# Altium PCB 驱动1.PCBDOC
Units mil, origin at the board's own origin, x right, y up, seen from the top; angles counter-clockwise.
Board outline 2276.43 x 1535.43 mil, 2 copper layers (Top Layer, Bottom Layer); 23 components, 13 nets, 73 pads, 0 vias.
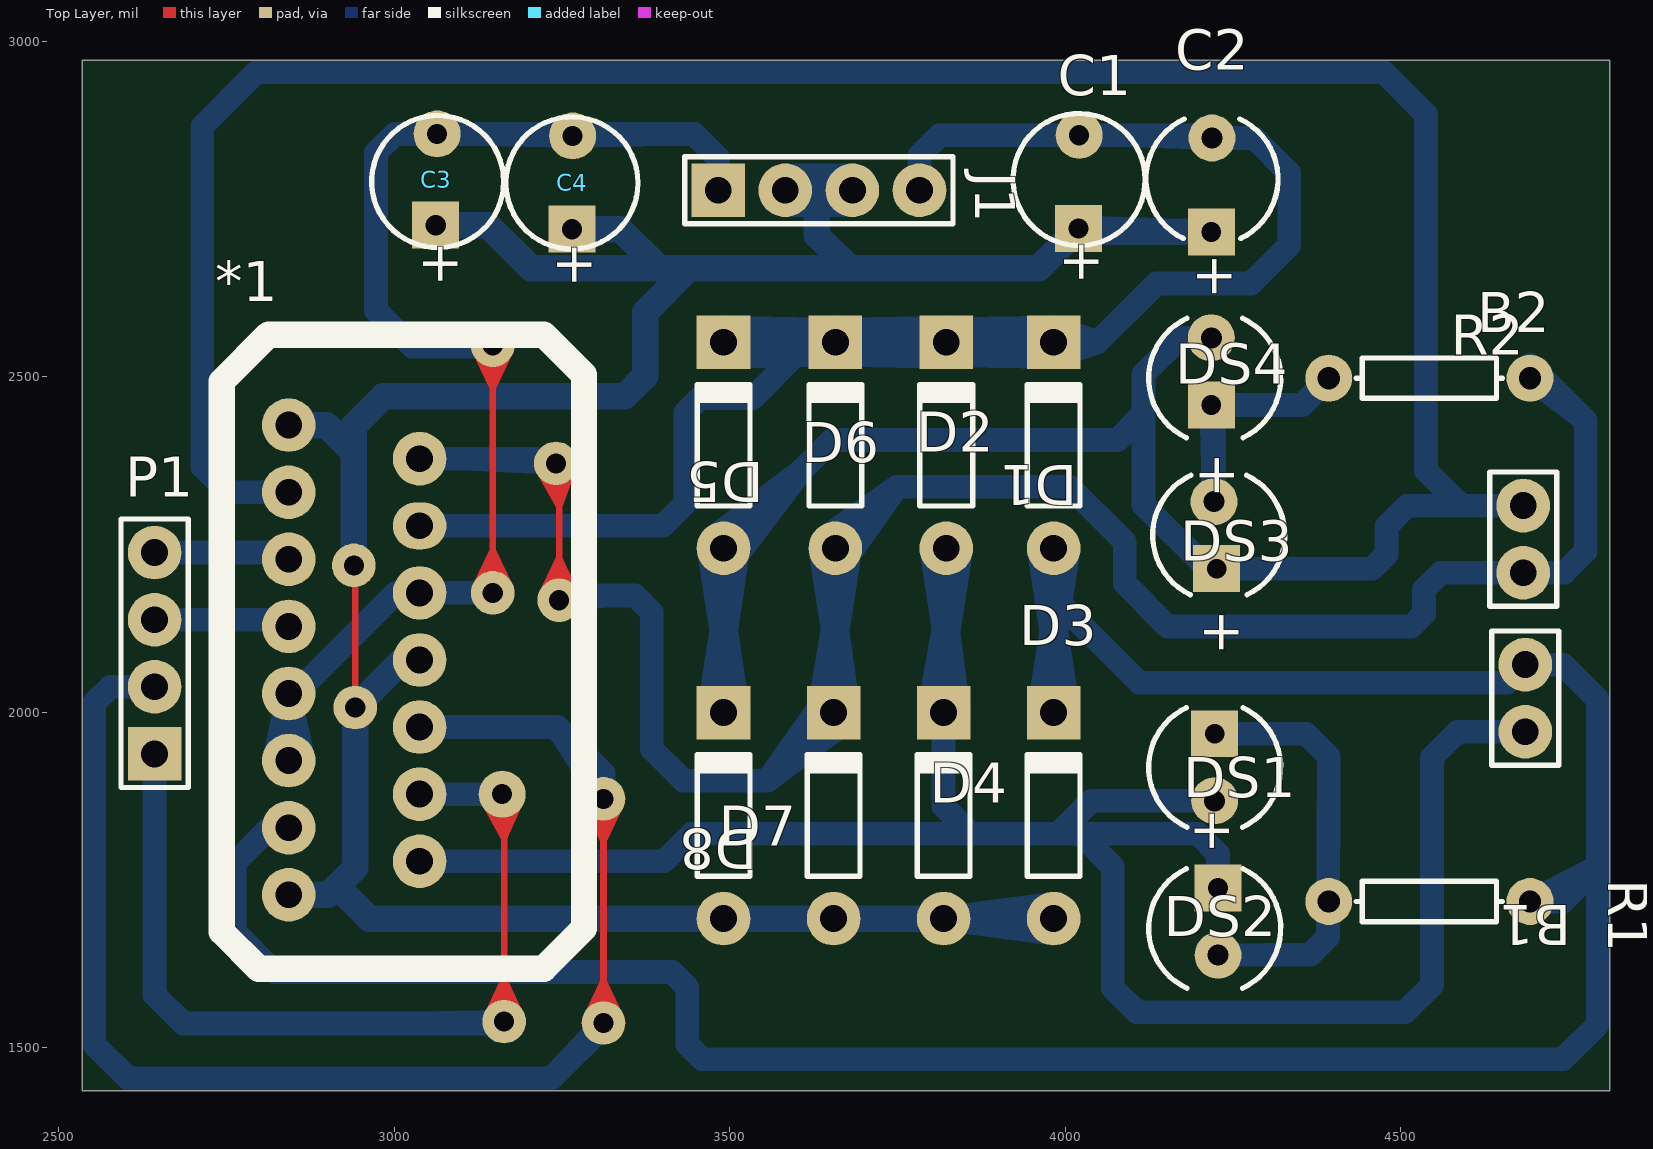
[diagram p0: Top Layer view]
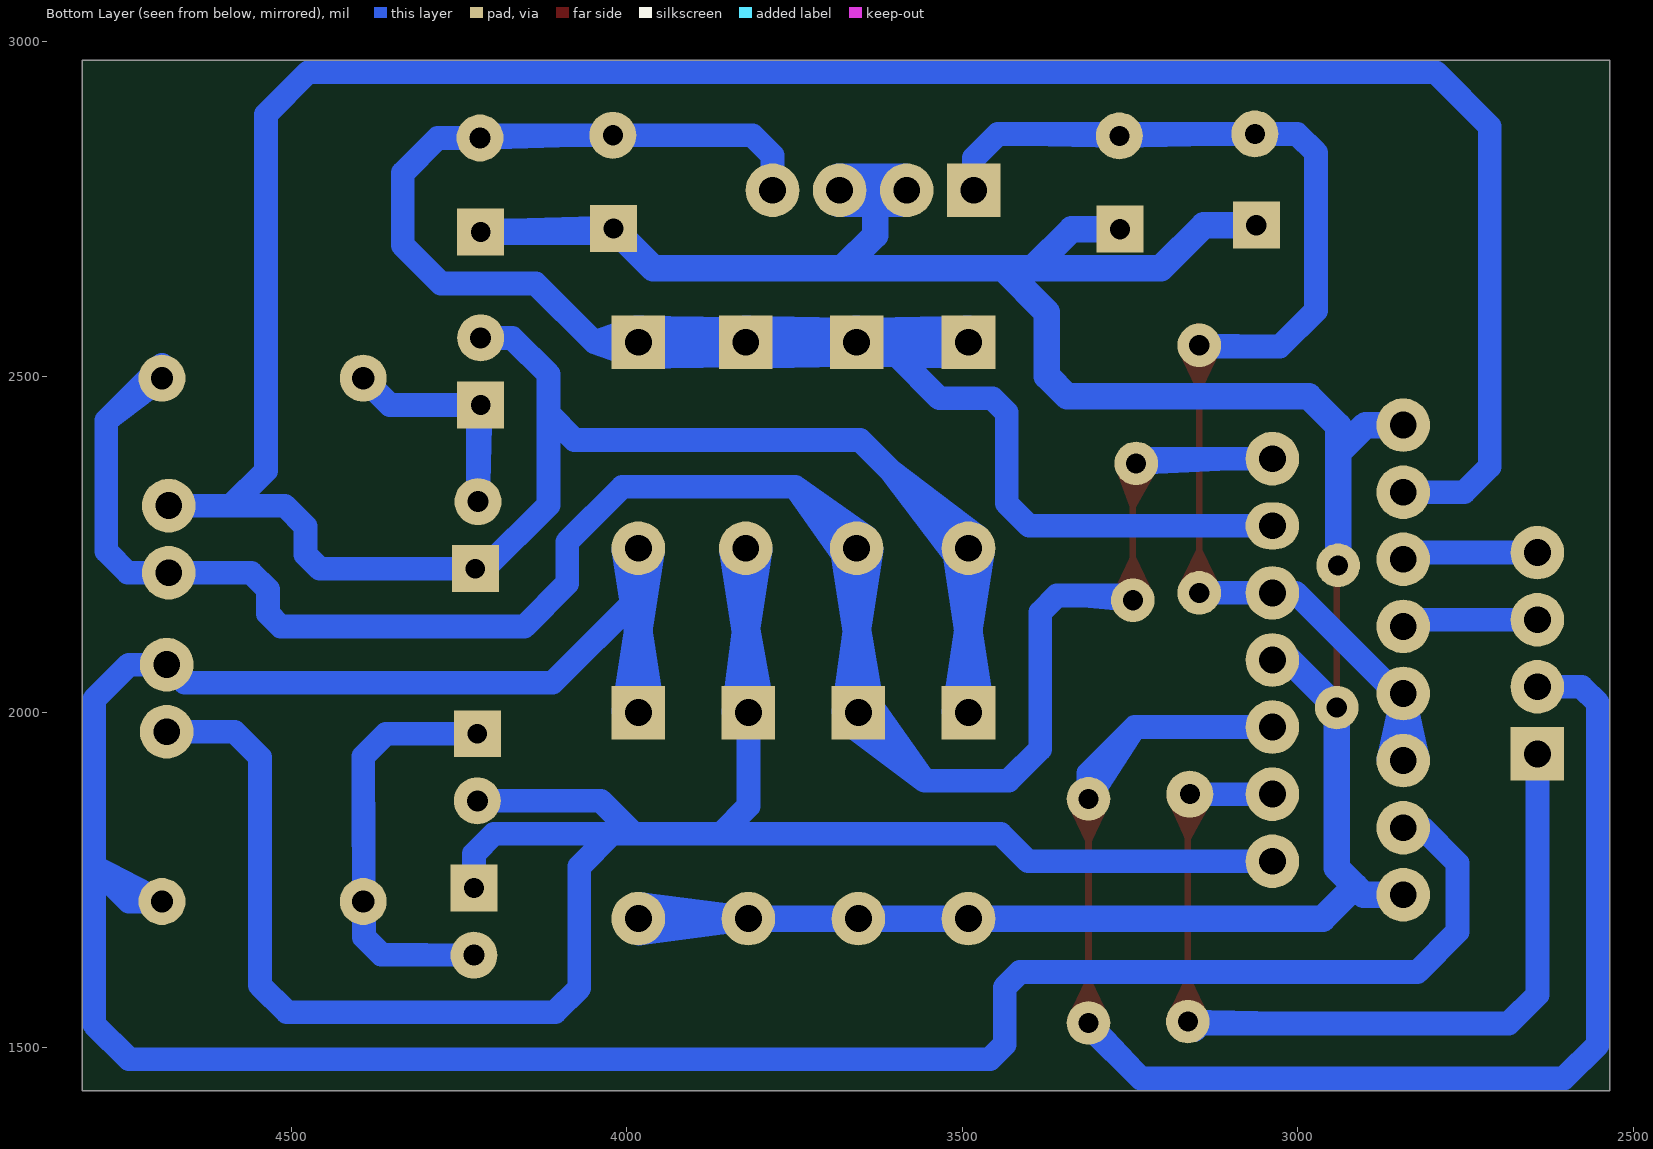
[diagram p1: Bottom Layer view, seen from below]

## Layer stack, top to bottom
Top Layer: signal copper 1.4
Dielectric: dielectric 12.6, FR-4, Dk 4.8
Bottom Layer: signal copper 1.4

## Board outline
2535.28,1436.28 4811.72,1436.28 4811.72,2971.72 2535.28,2971.72

## Design rules (kind name [scope] priority, off if disabled: settings)
Clearance [All] p1: gap=30
ComponentClearance [All] p1: gap=10 collisioncheckmode=0 verticalgap=10
FanoutControl Fanout_Small [All] p1 off: bgadir=Out bgaviamode=Centered fanoutstyle=Auto fanoutdirection=Alternating viagrid=1 // Protel DXP Scope 1 Expression Was: (CompPinCount < 5)   Fanout_Small (Default Rule)
FanoutControl Fanout_Default [All] p2: bgadir=Out bgaviamode=Centered fanoutstyle=Auto fanoutdirection=Alternating viagrid=1 // Fanout_Default (Default Rule)
FanoutControl Fanout_SOIC [All] p3 off: bgadir=Out bgaviamode=Centered fanoutstyle=Auto fanoutdirection=Alternating viagrid=1 // Protel DXP Scope 1 Expression Was: IsSOIC   Fanout_SOIC (Default Rule)
FanoutControl Fanout_BGA [All] p4 off: bgadir=Out bgaviamode=Centered fanoutstyle=Auto fanoutdirection=Alternating viagrid=1 // Protel DXP Scope 1 Expression Was: IsBGA   Fanout_BGA (Default Rule)
FanoutControl Fanout_LCC [All] p5 off: bgadir=Out bgaviamode=Centered fanoutstyle=Auto fanoutdirection=Alternating viagrid=1 // Protel DXP Scope 1 Expression Was: IsLCC   Fanout_LCC (Default Rule)
PolygonConnect [All] p1: connectstyle=Relief reliefconductorwidth=10 reliefentries=4 polygonreliefangle="90 Angle"
RoutingVias [All] p1: holewidth=28 width=50 viastyle="Through Hole" minholewidth=28 minwidth=50 maxholewidth=28 maxwidth=50
SolderMaskExpansion [All] p1: expansion=4
TestPointUsage [All] p1: valid=0 allowmultiple=FALSE
Testpoint [All] p1: side=15 testpointundercomponent=TRUE minsize=40 maxsize=100 preferedsize=60 minholesize=0 maxholesize=40 preferedholesize=32 testpointgrid=1 style=1023 order=0-112345678
Width Width_1 [InNet('GND')] p1: maxlimit=39.37 minlimit=10 preferedwidth=10
Width [All] p2: maxlimit=39.37 minlimit=10 preferedwidth=35.43
13 further rules are at their usual default settings.

## Components (designator, comment, footprint, x,y, rotation, side; value= is the part's Value field where it differs from the comment)
*1 "Component_1" PCBComponent_1 2843,2428 r0 top
B1 "Motor Servo" RAD-0.1 4686,2021 r270 top
B2 "Motor Servo" RAD-0.1 4683,2258 r90 top
C1 "Cap" CAPPR2-5x6.8#1 4021,2794 r90 top
C2 "Cap" CAPPR5-5x5#1 4219,2795 r90 top
C3 "Cap" CAPPR2-5x6.8#2 3065,2791 r90 top
C4 "Cap" CAPPR2-5x6.8#3 3265,2789 r90 top
D1 "Diode" DO-35A 3983,2398 r90 top
D2 "Diode" DO-35A 3823,2398 r90 top
D3 "Diode 1N4001" DO-35A 3983,1846 r90 top
D4 "Diode 1N4001" DO-35A 3819,1846 r90 top
D5 "Diode" DO-35A 3491,2398 r90 top
D6 "Diode" DO-35A 3657.67,2398 r90 top
D7 "Diode 1N4001" DO-35A 3655,1846 r90 top
D8 "Diode 1N4001" DO-35A 3491,1846 r90 top
DS1 "LED0" CAPPR5-5x5#2 4223,1918 r270 top
DS2 "LED0" CAPPR5-5x5#3 4223,1678 r270 top
DS3 "LED0" CAPPR5-5x5#4 4229,2264 r90 top
DS4 "LED0" CAPPR5-5x5#5 4223,2498 r90 top
J1 "CON4" HDR1X4 3483,2778 r0 top
P1 "Header 4" HDR1X4 2643,1938 r90 top
R1 "Res2" AXIAL-0.3 4543,1718 r0 top
R2 "Res2" AXIAL-0.3 4543,2498 r180 top

## Footprints (in the part's own frame and the unit in brackets; to place one, negate y for a bottom-side part, rotate by r counter-clockwise, add the part's x,y. Pads: shape width x height; smd on the part's side, far side on the other; paste and mask are expansions set on the pad)
AXIAL-0.3 [mil]
  round 70 hole 33.46: 1(-150,0) 2(150,0)
  silkscreen extent -109,-30 109,30
CAPPR2-5x6.8#1 [mil]
  rect 70x70 hole 30: 1(-73,1)
  round 70 hole 30: 2(66,0)
  silkscreen extent -98,-98 98,98
CAPPR2-5x6.8#2 [mil]
  rect 70x70 hole 30: 1(-65,3)
  round 70 hole 30: 2(71,1)
  silkscreen extent -98,-98 98,98
CAPPR2-5x6.8#3 [mil]
  rect 70x70 hole 30: 1(-69,0)
  round 70 hole 30: 2(70,-1)
  silkscreen extent -98,-98 98,98
CAPPR5-5x5#1 [mil]
  rect 70x70 hole 29.53: 1(-79,1)
  round 70 hole 31.5: 2(61,0)
  silkscreen extent -89,-98 89,98
CAPPR5-5x5#2 [mil]
  rect 70x70 hole 29.53: 1(-50,0)
  round 70 hole 31.5: 2(50,0)
  silkscreen extent -89,-98 89,98
CAPPR5-5x5#3 [mil]
  rect 70x70 hole 29.53: 1(-60,5)
  round 70 hole 31.5: 2(40,5)
  silkscreen extent -89,-98 89,98
CAPPR5-5x5#4 [mil]
  rect 70x70 hole 29.53: 1(-50,3)
  round 70 hole 31.5: 2(50,7)
  silkscreen extent -89,-98 89,98
CAPPR5-5x5#5 [mil]
  rect 70x70 hole 29.53: 1(-40,5)
  round 70 hole 31.5: 2(60,5)
  silkscreen extent -89,-98 89,98
DO-35A [mil]
  round 80 hole 40: 1(-153.54,0)
  rect 80x80 hole 40: 2(153.54,0)
  silkscreen extent -91,-39 94,39
HDR1X4 [mil]
  rect 80x80 hole 40: 1(0,0)
  round 80 hole 40: 2(100,0) 3(200,0) 4(300,0)
  silkscreen extent -50,-50 350,50
PCBComponent_1 [mil]
  round 80 hole 40: 1(0,0) 2(195,-50) 3(0,-100) 5(0,-200) 6(195,-250) 7(0,-300) 8(195,-350) 9(0,-400) 10(195,-450) 11(0,-500) 12(195,-550) 13(0,-600) 14(195,-650) 15(0,-700)
  oval 80x70 hole 40: 4(195,-150)
  silkscreen extent -100,-810 440,135
RAD-0.1 [mil]
  round 80 hole 40: 1(-50,0) 2(50,0)
  silkscreen extent -100,-50 100,50

## Free pads (board coordinates)
  round 65 hole 30: 0(2940,2219) 1(2942,2007) 4(3312,1537) 5(3164,1539) 6(3241,2371) 7(3246,2167) 8(3312,1871) 9(3147,2547) 10(3147,2178)
  round 70 hole 30: 2(3161,1878)

## Nets (pads, with @x,y where several pads share a name; then routed paths per layer and width w, separated by ;. In a path a pad name is that pad's centre, name@x,y a point inside that pad or via, vN(x,y) a via of type N, cw(c..) or ccw(c..) an arc to the next point about the centre after c; other vN are vias at no path point)
6: *1.6 *1.9 *1.11 C3.2 C4.2 J1.1 pad.9 pad.10 | length 3267.2
  Top Layer w10: pad.10@3120.17,2184.05 3147,2240.5 ; pad.9@3120.17,2540.95 3147,2484.5 ; pad.10@3129.67,2180.45 3147,2240.5 ; pad.9@3129.67,2544.55 3147,2484.5 ; pad.10@3139.51,2178.45 3147,2240.5 ; pad.9@3139.51,2546.55 3147,2484.5 ; pad.10 3147,2573 pad.9@3149,2575 ; pad.9 3147,2484.5 ; pad.10@3154.49,2178.45 3147,2240.5 ; pad.9@3154.49,2546.55 3147,2484.5 ; pad.10@3164.33,2180.45 3147,2240.5 ; pad.9@3164.33,2544.55 3147,2484.5 ; pad.10@3173.83,2184.05 3147,2240.5 ; pad.9@3173.83,2540.95 3147,2484.5
  Bottom Layer w35.43: *1.11@2820.86,1930.48 *1.9 ; *1.11 *1.9 ; *1.11@2865.14,1930.48 *1.9 ; pad.9@3119,2545 3027,2545 ; 3124.61,2862 C4.2 3407.38,2862 ; pad.10 3003,2178 2853,2028 *1.9 ; pad.9 3027,2545 ; J1.1 3483,2826 3447,2862 3001,2862 2973,2834 2973,2599 3027,2545
GND: *1.1 *1.8 *1.15 C1.1 C2.1 C3.1 C4.1 D3.1 D4.1 D7.1 D8.1 J1.2 J1.3 pad.0 pad.1 | length 7879.5
  Top Layer w10: pad.0 2942,2217 pad.1
  Bottom Layer w39.37: *1.15 2902,1728 2942,1768 pad.1 ; *1.1 2899,2428 2940,2387 ; 2914.66,1740.66 2962.86,1692.46 D3.1@3991,1692.46 ; pad.0 2940,2427 2984,2471 3344,2471 3374,2501 3374,2596 3440,2662 ; 2942,1856.39 pad.1 ; *1.8@3025.5,2090.5 pad.1 ; C3.1 3140,2726 3204,2662 3961,2662 ; C4.1 3337,2720 3395,2662 ; J1.3@3676.83,2758.65 J1.2@3587.39,2797.83 ; J1.3@3676.83,2797.35 J1.2@3587.39,2758.17 ; J1.3@3676.89,2758.62 J1.2@3585.06,2798.21 ; J1.3@3676.89,2797.38 J1.2@3585.06,2757.79 ; 3679,2662 3630,2711 3630,2778 ; D3.1@3981.69,1672.18 D4.1@3824.89,1692.46 ; D3.1@3981.69,1712.73 D4.1@3824.89,1692.46 ; D3.1 D4.1@3824.89,1692.46 ; 4173.35,2716 C1.1 ; 4173.39,2716 C1.1 ; J1.2 3680.94,2798.21 J1.2 ; J1.2 3680.94,2757.79 J1.2 ; J1.2 3630,2778 ; J1.2 J1.3 ; J1.2@3585.06,2757.79 3685.06,2757.79 J1.2@3587.39,2758.17 ; J1.2@3585.06,2757.79 J1.3 ; J1.2@3585.06,2798.21 3685.06,2798.21 J1.2@3587.39,2797.83 ; J1.2@3585.06,2798.21 J1.3 ; J1.2@3587.39,2758.17 J1.3 ; J1.2@3587.39,2758.17 3630,2778 ; J1.2@3587.39,2797.83 J1.3 ; J1.2@3587.39,2797.83 3630,2778 ; 3630,2778 J1.3 ; 3630,2778 J1.3@3679.11,2797.94 ; 3630,2778 J1.3@3679.11,2758.06 ; 3630,2778 J1.3 ; 3630,2778 J1.3@3679.11,2797.94 ; 3630,2778 J1.3@3679.11,2758.06 ; 3630,2778 J1.3 ; 3630,2778 J1.3@3679.11,2797.94 ; 3630,2778 J1.3@3679.11,2758.06 ; 3630,2778 J1.3@3679.11,2797.94 ; 3630,2778 J1.3@3679.11,2758.06 ; 3961,2662 C1.1 ; 3961,2662 C1.1 ; C1.1 4064.89,2716 C2.1 4025,2716 C1.1
IN1: *1.5 P1.4 | length 204.1
  Bottom Layer w35.43: P1.4 2833,2238 *1.5
IN2: *1.7 P1.3 | length 204.1
  Bottom Layer w35.43: P1.3 2833,2138 *1.7
IN3: *1.10 P1.2 pad.4 pad.8 | length 3111
  Top Layer w10: pad.4@3285.17,1543.05 3312,1599.5 ; pad.8@3285.17,1864.95 3312,1808.5 ; pad.4@3294.67,1539.45 3312,1599.5 ; pad.8@3294.67,1868.55 3312,1808.5 ; pad.4@3304.51,1537.45 3312,1599.5 ; pad.8@3304.51,1870.55 3312,1808.5 ; pad.4 pad.8 ; pad.4@3319.49,1537.45 3312,1599.5 ; pad.8@3319.49,1870.55 3312,1808.5 ; pad.4@3329.33,1539.45 3312,1599.5 ; pad.8@3329.33,1868.55 3312,1808.5 ; pad.4@3338.83,1543.05 3312,1599.5 ; pad.8@3338.83,1864.95 3312,1808.5
  Bottom Layer w35.43: P1.2 2577,2038 2553,2014 2553,1505 2604,1454 3234,1454 pad.4@3312,1532 ; *1.10 3243,1978 ; 3244,1464 pad.4 ; 3243,1978 pad.8 ; 3243,1978 3312,1909 ; pad.8 3312,1909 ; pad.8 3312,1909
IN4: *1.12 P1.1 pad.2 pad.5 | length 2330.6
  Top Layer w10: pad.2@3132.15,1869.77 3164,1812.84 ; pad.5@3137.17,1545.05 3164,1601.5 ; pad.2@3141.4,1874.03 3164,1812.84 ; pad.5@3146.67,1541.45 3164,1601.5 ; pad.2@3151.08,1876.78 3164,1812.84 ; pad.2@3152,1878 3164,1866 pad.5 ; pad.5@3156.51,1539.45 3164,1601.5 ; pad.2 3164,1812.84 ; pad.2@3171,1877.69 3164,1812.84 ; pad.5@3171.49,1539.45 3164,1601.5 ; pad.2@3180.88,1875.85 3164,1812.84 ; pad.5@3181.33,1541.45 3164,1601.5 ; pad.2@3190.48,1872.45 3164,1812.84 ; pad.5@3190.83,1545.05 3164,1601.5
  Bottom Layer w35.43: P1.1 2643,1579 2686,1536 3145,1536 pad.5@3155,1526 ; 3024.93,1536 pad.5 ; *1.12 pad.2
NetDS1_1: DS1.1 DS2.2 R1.1 | length 627.9
  Bottom Layer w35.43: DS1.1 4359,1968 4393,1934 4391.77,1664.86 4366.07,1638.85 DS2.2
NetDS3_2: DS3.2 DS4.1 R2.2 | length 703.1
  Bottom Layer w35.43: DS4.1@4218.08,2455.26 DS3.2 4222,2454 DS4.1 ; DS3.2@4222,2316.55 DS4.1 ; 4222,2375 DS4.1 ; R2.2 4353,2458 DS4.1
OU1: *1.2 B2.1 D6.1 D7.2 pad.6 pad.7 R2.1 | length 5712.4
  Top Layer w10: pad.6@3214.72,2362.89 3246,2308.18 ; pad.7@3219.17,2173.05 3246,2229.5 ; pad.6@3223.92,2367.2 3246,2308.18 ; pad.7@3228.67,2169.45 3246,2229.5 ; pad.6@3233.57,2369.96 3246,2308.18 ; pad.7@3238.51,2167.45 3246,2229.5 ; pad.7 3246,2366 pad.6 3246,2308.18 ; pad.6@3248.5,2371.15 3246,2308.18 ; pad.7@3253.49,2167.45 3246,2229.5 ; pad.6@3258.47,2369.95 3246,2308.18 ; pad.7@3263.33,2169.45 3246,2229.5 ; pad.6@3268.23,2367.15 3246,2308.18 ; pad.7@3272.83,2173.05 3246,2229.5
  Bottom Layer w35.43: *1.2 pad.6@3241,2378 ; 3101.67,2378 pad.6 ; pad.7@3239,2174 3359,2174 3384,2149 3384,1945 3431,1898 3556.12,1898 ; pad.7 3319,2174 ; D7.2@3632.82,2001.64 3657.67,2145.9 ; D6.1@3635.45,2242.76 3657.67,2098.16 ; D7.2@3637.86,2013.79 3556.12,1898 ; D6.1@3643.32,2261.51 3749.21,2336 ; D7.2@3669.69,1982.79 3556.12,1898 ; D6.1@3674.72,2230.11 3749.21,2336 ; D7.2@3677.25,2000.83 3657.67,2145.9 ; D6.1@3679.89,2242.76 3657.67,2098.16 ; R2.1@4686,2511 4693,2518 4776,2435 ; R2.1 4776,2435 ; 3556.12,1898 D7.2 3657.67,2145.9 ; 3556.12,1898 3657.67,1999.54 D6.1 ; 3657.67,2098.16 D6.1 ; D6.1 3749.21,2336 ; 3749.21,2336 4007,2336 4089,2254 4089,2192 4153,2128 4516,2128 4535,2147 4535,2183 4560,2208 4744,2208 4776,2240 4776,2435
OU2: *1.3 B2.2 D5.1 D8.2 DS3.1 DS4.2 | length 6471.4
  Bottom Layer w35.43: *1.3 2752,2328 2714,2366 2714,2873 2795,2954 4475,2954 4538,2891 4538,2360 4590,2308 ; D8.2@3468.78,2001.24 3491,2145.84 D8.2@3513.22,2001.24 ; D5.1@3468.78,2242.76 3491,2098.16 ; D5.1@3476.36,2261.25 3606.16,2359.62 D5.1@3507.8,2229.81 ; D8.2 D5.1 ; D5.1@3513.22,2242.76 3491,2098.16 ; 4117,2403 4117,2504 4171,2558 ; 4117,2445 4078,2406 3652.54,2406 D5.1 ; 4117,2500.68 4117,2309 4212,2214 4458,2214 4479,2235 4479,2277 4510,2308 B2.2 ; DS3.1 4367.3,2214 ; 3491,2098.16 D5.1 ; 4171,2558 DS4.2 ; 4171,2558 DS4.2 ; 4171,2558 DS4.2
OU3: *1.13 B1.1 D1.1 D3.2 R1.2 | length 5029.3
  Bottom Layer w35.43: *1.13 2815,1828 2762,1775 2762,1673 2822,1613 3414,1613 3437,1590 3437,1505 3459,1483 4742,1483 4794,1535 4794,2019 4742,2071 B1.1 4659,2044 4111,2044 3983,2172 ; D3.2@3960.78,2001.24 3983,2145.84 D3.2@4005.22,2001.24 ; D1.1@3960.78,2242.76 3983,2098.16 ; D3.2 D1.1 3983,2098.16 ; D1.1@4005.22,2242.76 3983,2098.16 ; R1.2 4742,1718 ; R1.2 4794,1770 4742,1718 ; R1.2 4742,1718
OU4: *1.14 B1.2 D2.1 D4.2 DS1.2 DS2.1 | length 3945.7
  Bottom Layer w35.43: *1.14 3402,1778 3443,1819 4198,1819 4228,1789 DS2.1 ; D4.2@3796.84,2001.84 3823,2146 ; D2.1@3800.78,2242.76 3823,2098.16 D2.1@3845.22,2242.76 ; D2.1 3823,2003.54 D4.2 ; D4.2@3841.26,2000.63 3823,2146 ; 3860,1819 3819,1860 D4.2 ; 3994.77,1823.77 4039,1868 DS1.2 ; 4022,1819 4071,1770 4071,1589 4107,1553 4507,1553 4547,1593 4547,1933 4585,1971 B1.2 ; D4.2 3823,2146
VCC: *1.4 C1.2 C2.2 D1.2 D2.2 D5.2 D6.2 J1.4 | length 7476.4
  Bottom Layer w35.43: *1.4 3400.44,2278 3434,2311.56 3434,2447 3455,2468 3533.97,2468 3597.48,2531.51 ; *1.4@3043,2278 3184.3,2278 ; D5.2@3489.77,2529.29 D6.2@3636.56,2532.31 ; D5.2@3489.77,2573.79 D6.2@3636.56,2570.78 ; D5.2@3492.7,2529.32 3637.3,2551.54 D5.2@3492.7,2573.76 ; D5.2@3495.59,2529.74 D6.2@3636.56,2570.78 ; D5.2@3495.59,2573.35 D6.2@3636.56,2532.31 ; D6.2@3655.97,2529.32 3511.37,2551.54 D6.2@3655.97,2573.76 ; D6.2 3750,2551.54 ; D6.2@3659.36,2529.32 3803.97,2551.54 D6.2@3659.36,2573.76 ; D6.2@3660.36,2529.42 3750,2551.54 ; D6.2@3660.36,2573.66 3750,2551.54 ; J1.4 3783,2830 3813,2860 C2.2@4215,2860 ; D2.2@3818.38,2529.74 D6.2@3677.49,2570.98 ; D2.2@3818.38,2573.34 D6.2@3677.49,2532.11 ; D2.2@3821.3,2529.32 3676.7,2551.54 D2.2@3821.3,2573.76 ; D2.2@3824.26,2529.3 D6.2@3677.49,2532.11 ; D2.2@3824.26,2573.79 D6.2@3677.49,2570.98 ; D2.2@3824.7,2529.32 3969.3,2551.54 D2.2@3824.7,2573.76 ; D1.2@3978.26,2529.77 D2.2@3837.65,2571.77 ; D1.2@3978.26,2573.32 D2.2@3837.65,2531.32 ; D1.2@3981.3,2529.32 3836.7,2551.54 D1.2@3981.3,2573.76 ; D1.2@3984.39,2529.3 D2.2@3837.65,2531.32 ; D1.2@3984.39,2573.78 D2.2@3837.65,2571.77 ; D1.2@3986.79,2529.58 4048.54,2551.54 ; D1.2@3986.79,2573.5 4048.54,2551.54 ; 4077.49,2860 C2.2 4282,2856 4334,2804 4334,2696 4277,2639 4136,2639 4048.54,2551.54 ; D5.2 D6.2@3636.56,2570.78 ; D5.2 D6.2@3636.56,2532.31 ; D5.2 4048.54,2551.54 ; D6.2@3677.49,2532.11 D2.2 D6.2@3677.49,2570.98 ; D2.2@3837.65,2531.32 D1.2 D2.2@3837.65,2571.77

## Text inside footprints (layer, text, board x,y; h text height)
C1: Top Overlay "+" at 4050.53,2637.5 h59.06 r90
C2: Top Overlay "+" at 4248.53,2615.87 h59.06 r90
C3: Top Overlay "+" at 3094.53,2634.5 h59.06 r90
C4: Top Overlay "+" at 3294.53,2632.5 h59.06 r90
DS2: Top Overlay "+" at 4193.47,1857.13 h59.06 r270
DS3: Top Overlay "+" at 4258.53,2084.87 h59.06 r90
DS4: Top Overlay "+" at 4252.53,2318.87 h59.06 r90